# Altium PCB miniTop.PcbDoc
Units mil, origin at the board's own origin, x right, y up, seen from the top; angles counter-clockwise.
Board outline 1250 x 675 mil, 2 copper layers (Top Layer, Bottom Layer), stack 65.792 mil thick; 15 components, 17 nets, 38 pads, 0 vias.
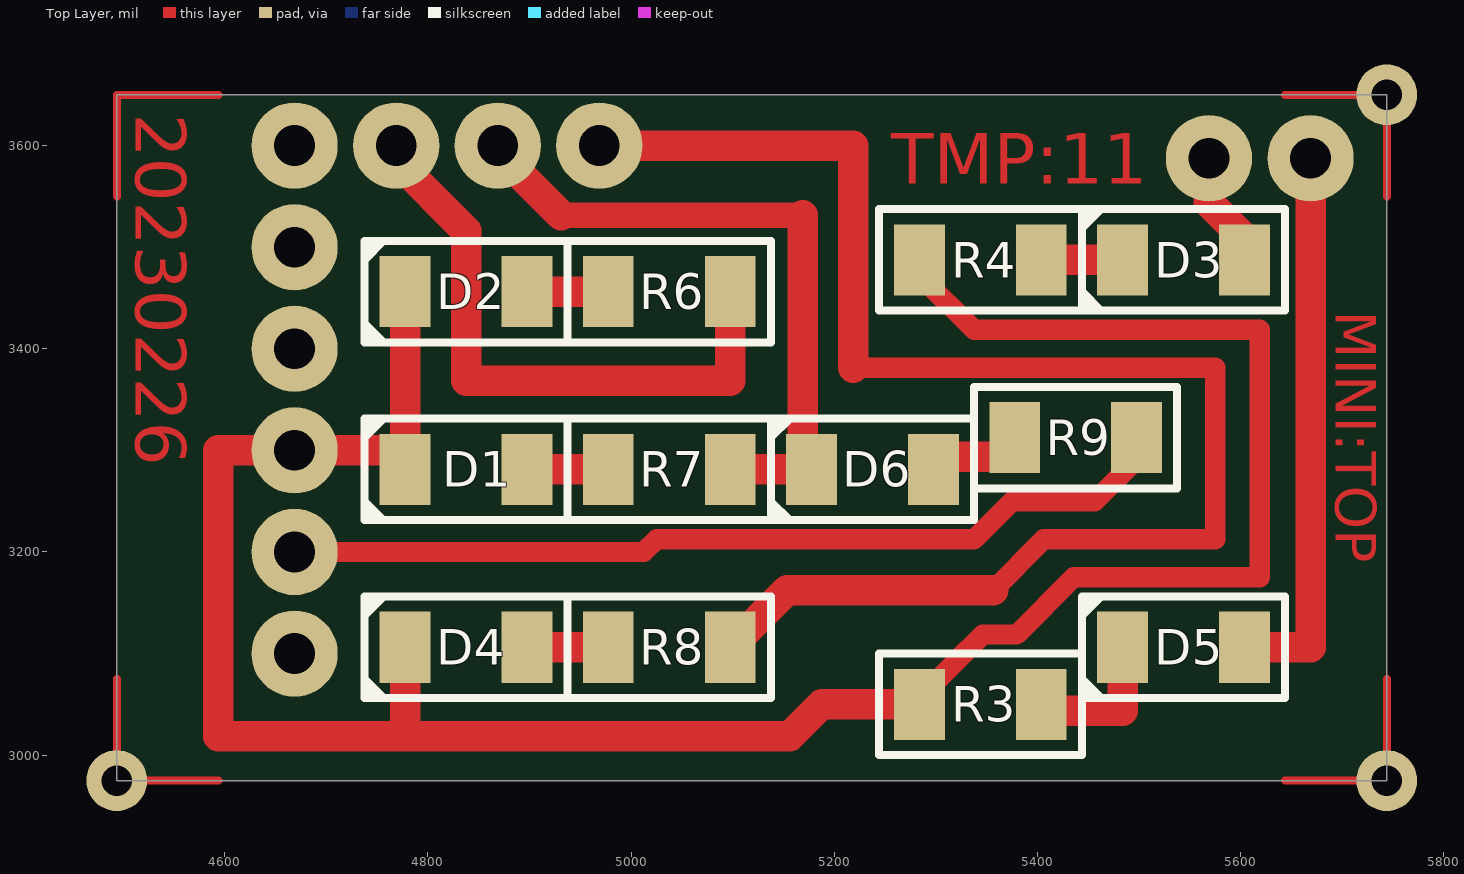
[diagram p0: Top Layer view]
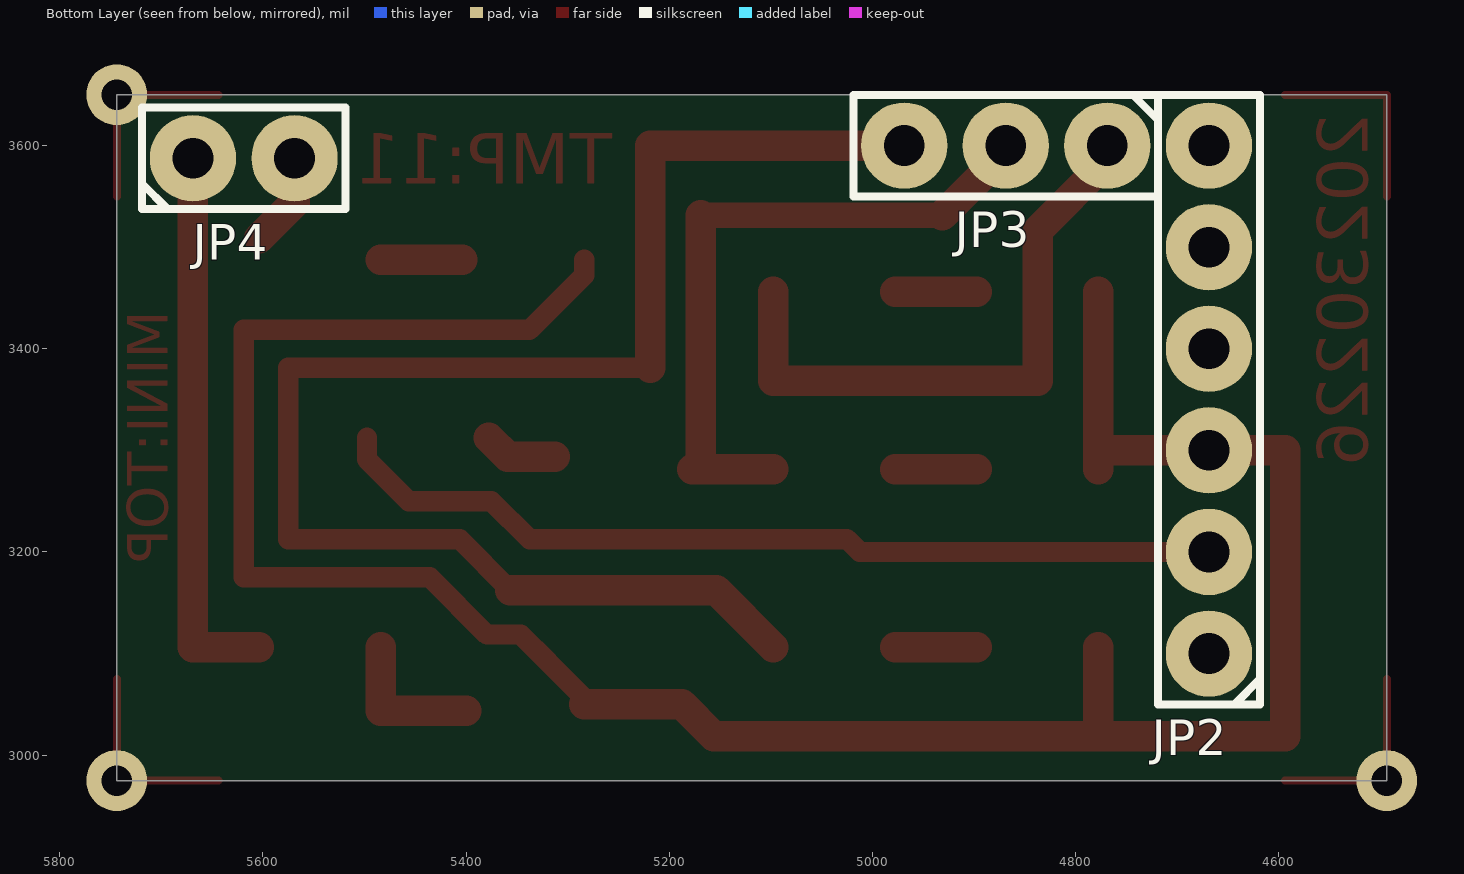
[diagram p1: Bottom Layer view, seen from below]
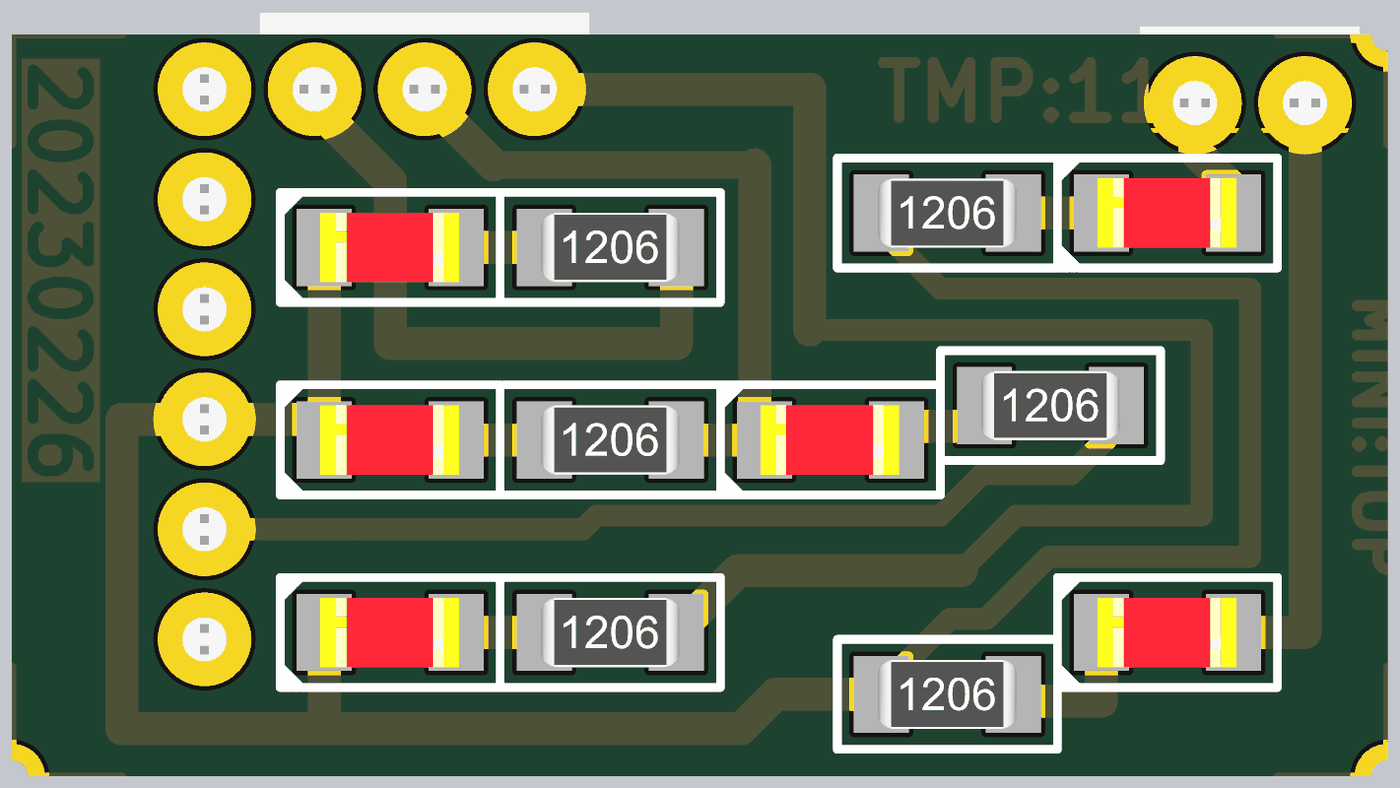
[diagram p2: 3D render of the assembled board from above, using the file's embedded part models]
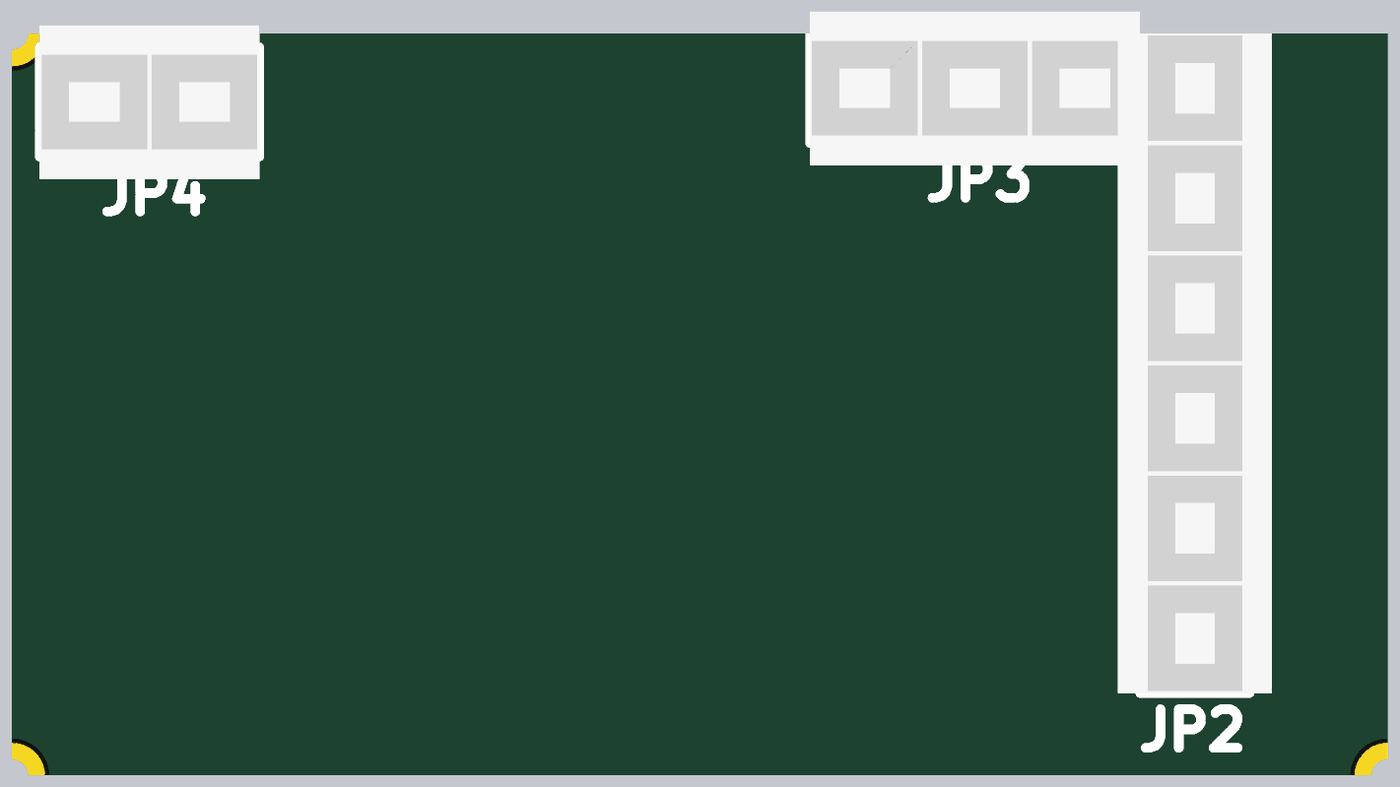
[diagram p3: 3D render of the assembled board from below, using the file's embedded part models]

## Layer stack, top to bottom
Top Layer: signal copper 1.4
Dielectric: core 62.9921, FR-4, Dk 4.8
Bottom Layer: signal copper 1.4

## Board outline
4493.75,3650 4493.75,2975 5743.75,2975 5743.75,3650

## Design rules (kind name [scope] priority, off if disabled: settings)
Clearance [All] p1: gap=12.5
PolygonConnect [All] p1: connectstyle=Relief reliefconductorwidth=20 reliefentries=4 polygonreliefangle="90 Angle"
RoutingVias [All] p1: holewidth=28 width=50 viastyle="Through Hole" minholewidth=28 minwidth=50 maxholewidth=28 maxwidth=50
SilkscreenOverComponentPads [All] p1: minsilkscreentomaskgap=10
SolderMaskExpansion [All] p1: expansion=4
Width [All] p1: maxlimit=100 minlimit=10 preferedwidth=20
27 further rules are at their usual default settings.

## Components (designator, comment, footprint, x,y, rotation, side; value= is the part's Value field where it differs from the comment)
D1 "Led 5mm Rojo Difuso" LED_1206 4837.5,3281.25 r180 top
D2 "Led 5mm Rojo Difuso" LED_1206 4837.5,3456.25 r180 top
D3 "Led 5mm Rojo Difuso" LED_1206 5543.75,3487.5 r180 top
D4 "Led 5mm Rojo Difuso" LED_1206 4837.5,3106.25 r180 top
D5 "Led 5mm Rojo Difuso" LED_1206 5543.75,3106.25 r180 top
D6 "Led 5mm Rojo Difuso" LED_1206 5237.5,3281.25 r180 top (schematic designator D5)
JP2 "Header6x1" HDR6x1_FEMALE 4668.75,3100 r90 bottom
JP3 "Header3x1" HDR3x1_FEMALE 4768.75,3600 r0 bottom
JP4 "Header2x1" HDR2x1_FEMALE 5668.75,3587.5 r180 bottom
R3 "Resistencia 1206; 10Kohm" R1206 5343.75,3050 r0 top
R4 "Resistencia 1206; 10Kohm" R1206 5343.75,3487.5 r0 top
R6 "Resistencia 1206; 10Kohm" R1206 5037.5,3456.25 r0 top
R7 "Resistencia 1206; 10Kohm" R1206 5037.5,3281.25 r0 top
R8 "Resistencia 1206; 10Kohm" R1206 5037.5,3106.25 r0 top
R9 "Resistencia 1206; 10Kohm" R1206 5437.5,3312.5 r0 top (schematic designator R7)

## Footprints (in the part's own frame and the unit in brackets; to place one, negate y for a bottom-side part, rotate by r counter-clockwise, add the part's x,y. Pads: shape width x height; smd on the part's side, far side on the other; paste and mask are expansions set on the pad)
HDR2x1_FEMALE [mil]
  round 85 hole 40: 1(0,0) 2(100,0)
  silkscreen extent -50,-50 150,50, body extent -50,-70 150,70, height 266
HDR3x1_FEMALE [mil]
  round 85 hole 40: 1(0,0) 2(100,0) 3(200,0)
  silkscreen extent -50,-50 250,50, body extent -50,-70 250,70, height 266
HDR6x1_FEMALE [mil]
  round 85 hole 40: 1(0,0) 2(100,0) 3(200,0) 4(300,0) 5(400,0) 6(500,0)
  silkscreen extent -50,-50 550,50, body extent -50,-70 550,70, height 266
LED_1206 [mil]
  rect 50x70 smd: 1(-60,0) 2(60,0)
  silkscreen extent -100,-50 100,50, body extent -62,-31 64,32, height 44
R1206 [mil]
  rect 50x70 smd: 1(-60,0) 2(60,0)
  silkscreen extent -100,-50 100,50, body extent -63,-31 63,32, height 34

## Part data
JP2: "Header 6x1"
JP3: "Header 3x1"
JP4: "Header 2x1"

## Free pads (board coordinates)
  round 60 hole 30: 0(5743.75,2975) 1(4493.75,2975) 2(5743.75,3650)

## Nets (pads, with @x,y where several pads share a name; then routed paths per layer and width w, separated by ;. In a path a pad name is that pad's centre, name@x,y a point inside that pad or via, vN(x,y) a via of type N, cw(c..) or ccw(c..) an arc to the next point about the centre after c; other vN are vias at no path point)
DP: JP2.1
GND: D1.2 D2.2 D4.2 JP2.3 R3.1 R4.1 | length 2625.2
  Top Layer w20: R3.1@5283.75,3056.25 5346.25,3118.75 ; R4.1 5283.75,3472.5 5337.5,3418.75 5618.75,3418.75 5618.75,3343.75 ; 5318.75,3091.25 5346.25,3118.75 ; 5450,3175 5435.62,3175 ; 5618.75,3387.5 5618.75,3175 5435.62,3175 ; 5346.25,3118.75 5379.38,3118.75 5435.62,3175
  Top Layer w30: D4.2 4777.5,3018.75 5156.25,3018.75 ; D1.2 D2.2 ; D1.2@4777.5,3300 JP2.3 4593.75,3300 4593.75,3018.75 4793.75,3018.75 ; 5075,3018.75 5156.25,3018.75 ; R3.1 5187.5,3050 5156.25,3018.75
IN: JP2.4
NetD1_1: D1.1 R7.1 | length 80
  Top Layer w30: D1.1 R7.1
NetD2_1: D2.1 R6.1 | length 80
  Top Layer w30: D2.1 R6.1
NetD3_2: D3.2 R4.2 | length 80
  Top Layer w30: R4.2 D3.2
NetD4_1: D4.1 R8.1 | length 80
  Top Layer w30: D4.1 R8.1
NetD5_2: D5.2 R3.2 | length 146.2
  Top Layer w30: R3.2@5400,3043.75 5483.75,3043.75 D5.2
NetD6_1: D6.1 R9.1 | length 72.8
  Top Layer w30: D6.1@5312.5,3293.75 5358.75,3293.75 R9.1
OUT: JP2.5
PWMA: JP2.6
RA1: D5.1 JP4.1 | length 546.2
  Top Layer w30: D5.1 5668.75,3106.25 JP4.1
RA3: D3.1 JP4.2 | length 93.2
  Top Layer w30: JP4.2 5568.75,3543.75 D3.1@5603.75,3508.75
RB3: JP3.3 R8.2 | length 1534
  Top Layer w20: 5218.75,3381.25 5575,3381.25 5575,3212.5 5406.25,3212.5 5356.25,3162.5 5337.5,3162.5
  Top Layer w30: JP3.3 5218.75,3600 5218.75,3381.25 ; R8.2 5153.75,3162.5 5356.25,3162.5
RB4: D6.2 JP3.2 R7.2 | length 655.9
  Top Layer w25: 4931.25,3531.25 5168.75,3531.25
  Top Layer w30: JP3.2 4868.75,3593.75 4931.25,3531.25 ; R7.2 D6.2 ; D6.2@5168.75,3287.5 5168.75,3531.25
RB5: JP3.1 R6.2 | length 607.2
  Top Layer w30: JP3.1 4768.75,3585 4837.5,3516.25 4837.5,3368.75 5097.5,3368.75 R6.2
VCC: JP2.2 R9.2 | length 997.8
  Top Layer w20: JP2.2 5012.5,3200 5025,3212.5 ; 5118.75,3212.5 5025,3212.5 ; 5212.5,3212.5 5337.5,3212.5 5375,3250 5456.25,3250 5497.5,3291.25 R9.2 ; 5228.75,3212.5 5025,3212.5
copper on no net: | length 800
  Top Layer w7.87: 4493.75,3075 4493.75,2975 4593.75,2975 ; 4493.75,3550 4493.75,3650 4593.75,3650 ; 5643.75,2975 5743.75,2975 5743.75,3075 ; 5643.75,3650 5743.75,3650 5743.75,3550

## Other copper
Top Layer:
  text "20230226" at 4512.5,3631.25 h50 r270
  text "TMP:11" at 5256.25,3562.5 h50
  text "MINI:TOP" at 5693.75,3437.5 h40 r270

## Silkscreen, mask and mechanical layers (free items; w line width, h text height)
etiquetas:
  lines w7.87: 4737.5,3056.25 4937.5,3056.25 ; 4737.5,3056.25 4937.5,3056.25 ; 4737.5,3056.25 4737.5,3156.25 ; 4737.5,3156.25 4937.5,3156.25 ; 4737.5,3156.25 4937.5,3156.25 ; 4737.5,3231.25 4937.5,3231.25 ; 4737.5,3231.25 4737.5,3331.25 ; 4737.5,3231.25 4937.5,3231.25 ; 4737.5,3331.25 4937.5,3331.25 ; 4737.5,3331.25 4937.5,3331.25 ; 4737.5,3406.25 4937.5,3406.25 ; 4737.5,3406.25 4937.5,3406.25 ; 4737.5,3406.25 4737.5,3506.25 ; 4737.5,3506.25 4937.5,3506.25 ; 4737.5,3506.25 4937.5,3506.25 ; 4937.5,3056.25 4937.5,3156.25 ; 4937.5,3056.25 4937.5,3156.25 ; 4937.5,3231.25 4937.5,3331.25 ; 4937.5,3231.25 4937.5,3331.25 ; 4937.5,3406.25 4937.5,3506.25 ; 4937.5,3406.25 4937.5,3506.25 ; 5137.5,3231.25 5137.5,3331.25 ; 5137.5,3231.25 5337.5,3231.25 ; 5137.5,3231.25 5337.5,3231.25 ; 5137.5,3231.25 5137.5,3331.25 ; 5137.5,3331.25 5337.5,3331.25 ; 5137.5,3331.25 5337.5,3331.25 ; 5337.5,3231.25 5337.5,3331.25 ; 5337.5,3231.25 5337.5,3331.25 ; 5443.75,3056.25 5643.75,3056.25 ; 5443.75,3056.25 5643.75,3056.25 ; 5443.75,3056.25 5443.75,3156.25 ; 5443.75,3156.25 5643.75,3156.25 ; 5443.75,3156.25 5643.75,3156.25 ; 5443.75,3437.5 5443.75,3537.5 ; 5443.75,3437.5 5643.75,3437.5 ; 5443.75,3437.5 5643.75,3437.5 ; 5443.75,3437.5 5443.75,3537.5 ; 5443.75,3537.5 5643.75,3537.5 ; 5443.75,3537.5 5643.75,3537.5 ; 5643.75,3056.25 5643.75,3156.25 ; 5643.75,3056.25 5643.75,3156.25 ; 5643.75,3437.5 5643.75,3537.5 ; 5643.75,3437.5 5643.75,3537.5 ; 4493.75,2975 5743.75,2975 5743.75,3650 4493.75,3650 4493.75,2975
  text "IN" at 5500,3456.25 h60
  text "OUT" at 4756.25,3425 h60
  text "UP" at 4793.75,3250 h60
  text "DWN" at 5156.25,3250 h60
  text "RST" at 4756.25,3075 h60
  text "OUT" at 5462.5,3075 h60
borderPcb:
  the board outline again, w7.87
etiquetasAux:
  lines w7.87: 4481.25,2331.25 5756.25,2331.25 ; 4481.25,2393.75 5756.25,2393.75 ; 4481.25,2943.75 5756.25,2943.75 ; 4537.5,2331.25 4537.5,2943.75 ; 5700,2331.25 5700,2943.75 ; 4481.25,2137.5 5756.25,2137.5 5756.25,3750 4481.25,3750 4481.25,2137.5
  lines w10: 4737.5,3056.25 4737.5,3156.25 4937.5,3156.25 4937.5,3056.25 4737.5,3056.25 ; 4737.5,3231.25 4737.5,3331.25 4937.5,3331.25 4937.5,3231.25 4737.5,3231.25 ; 4737.5,3406.25 4937.5,3406.25 4937.5,3506.25 4737.5,3506.25 4737.5,3406.25 ; 5443.75,3056.25 5443.75,3156.25 5643.75,3156.25 5643.75,3056.25 5443.75,3056.25 ; 5443.75,3437.5 5443.75,3537.5 5643.75,3537.5 5643.75,3437.5 5443.75,3437.5
  text "IN1" at 5475,3462.5 h50
  text "BLK" at 4768.75,3431.25 h50
  text "SET" at 4768.75,3256.25 h50
  text "RST" at 4768.75,3081.25 h50
  text "OUT" at 5475,3081.25 h50
topOverlayAux:
  text "RB5" at 4750,3787.5 h45 r270
  text "RB4" at 4850,3787.5 h45 r270
  text "RB3" at 4943.75,3787.5 h45 r270
  text "RA3" at 5550,3775 h45 r270
  text "RA1" at 5643.75,3775 h45 r270
  text "RB2" at 4481.25,3575 h45
  text "RB1" at 4481.25,3475 h45
  text "RA3" at 5481.25,3425 h45
  text "RB0" at 4481.25,3375 h45
  text "RB5" at 4787.5,3375 h45
  text "GND" at 4481.25,3275 h45
  text "RB4" at 4781.25,3212.5 h45
  text "#RB4" at 5150,3212.5 h45
  text "VCC" at 4481.25,3175 h45
  text "RC2" at 4481.25,3075 h45
  text "RB3" at 4775,3031.25 h45
  text "RA1" at 5487.5,3031.25 h45
  text "/DP" at 4481.25,3006.25 h45
mechanicalAux:
  lines w7.87: 4481.25,2331.25 5756.25,2331.25 ; 4481.25,2943.75 5756.25,2943.75 ; 4656.25,2387.5 4681.25,2387.5 ; 4656.25,2487.5 4681.25,2487.5 ; 4656.25,2587.5 4681.25,2587.5 ; 4656.25,2687.5 4681.25,2687.5 ; 4656.25,2787.5 4681.25,2787.5 ; 4656.25,2887.5 4681.25,2887.5 ; 4668.75,2375 4668.75,2400 ; 4668.75,2475 4668.75,2500 ; 4668.75,2575 4668.75,2600 ; 4668.75,2675 4668.75,2700 ; 4668.75,2775 4668.75,2800 ; 4668.75,2875 4668.75,2900 ; 5556.25,2387.5 5581.25,2387.5 ; 5556.25,2487.5 5581.25,2487.5 ; 5556.25,2587.5 5581.25,2587.5 ; 5556.25,2687.5 5581.25,2687.5 ; 5556.25,2787.5 5581.25,2787.5 ; 5556.25,2887.5 5581.25,2887.5 ; 5568.75,2375 5568.75,2400 ; 5568.75,2475 5568.75,2500 ; 5568.75,2575 5568.75,2600 ; 5568.75,2675 5568.75,2700 ; 5568.75,2775 5568.75,2800 ; 5568.75,2875 5568.75,2900 ; 4481.25,2137.5 5756.25,2137.5 5756.25,3750 4481.25,3750 4481.25,2137.5 ; 4618.75,2337.5 4618.75,2937.5 4718.75,2937.5 4718.75,2337.5 4618.75,2337.5 ; 5518.75,2337.5 5618.75,2337.5 5618.75,2937.5 5518.75,2937.5 5518.75,2337.5

## Dimensions
4481.25,3750 to 4481.25,2137.5 on dimensionAux
4481.25,2137.5 to 5756.25,2137.5 on dimensionAux